# Altium PCB STM32F429_18Bit_20_09.PcbDoc (part 2 of 3)
Units mm, origin at the board's own origin, x right, y up, seen from the top; angles counter-clockwise.
Board outline 101.05 x 79.2 mm, 2 copper layers (Top Layer, Bottom Layer); 115 components, 171 nets, 599 pads, 391 vias.
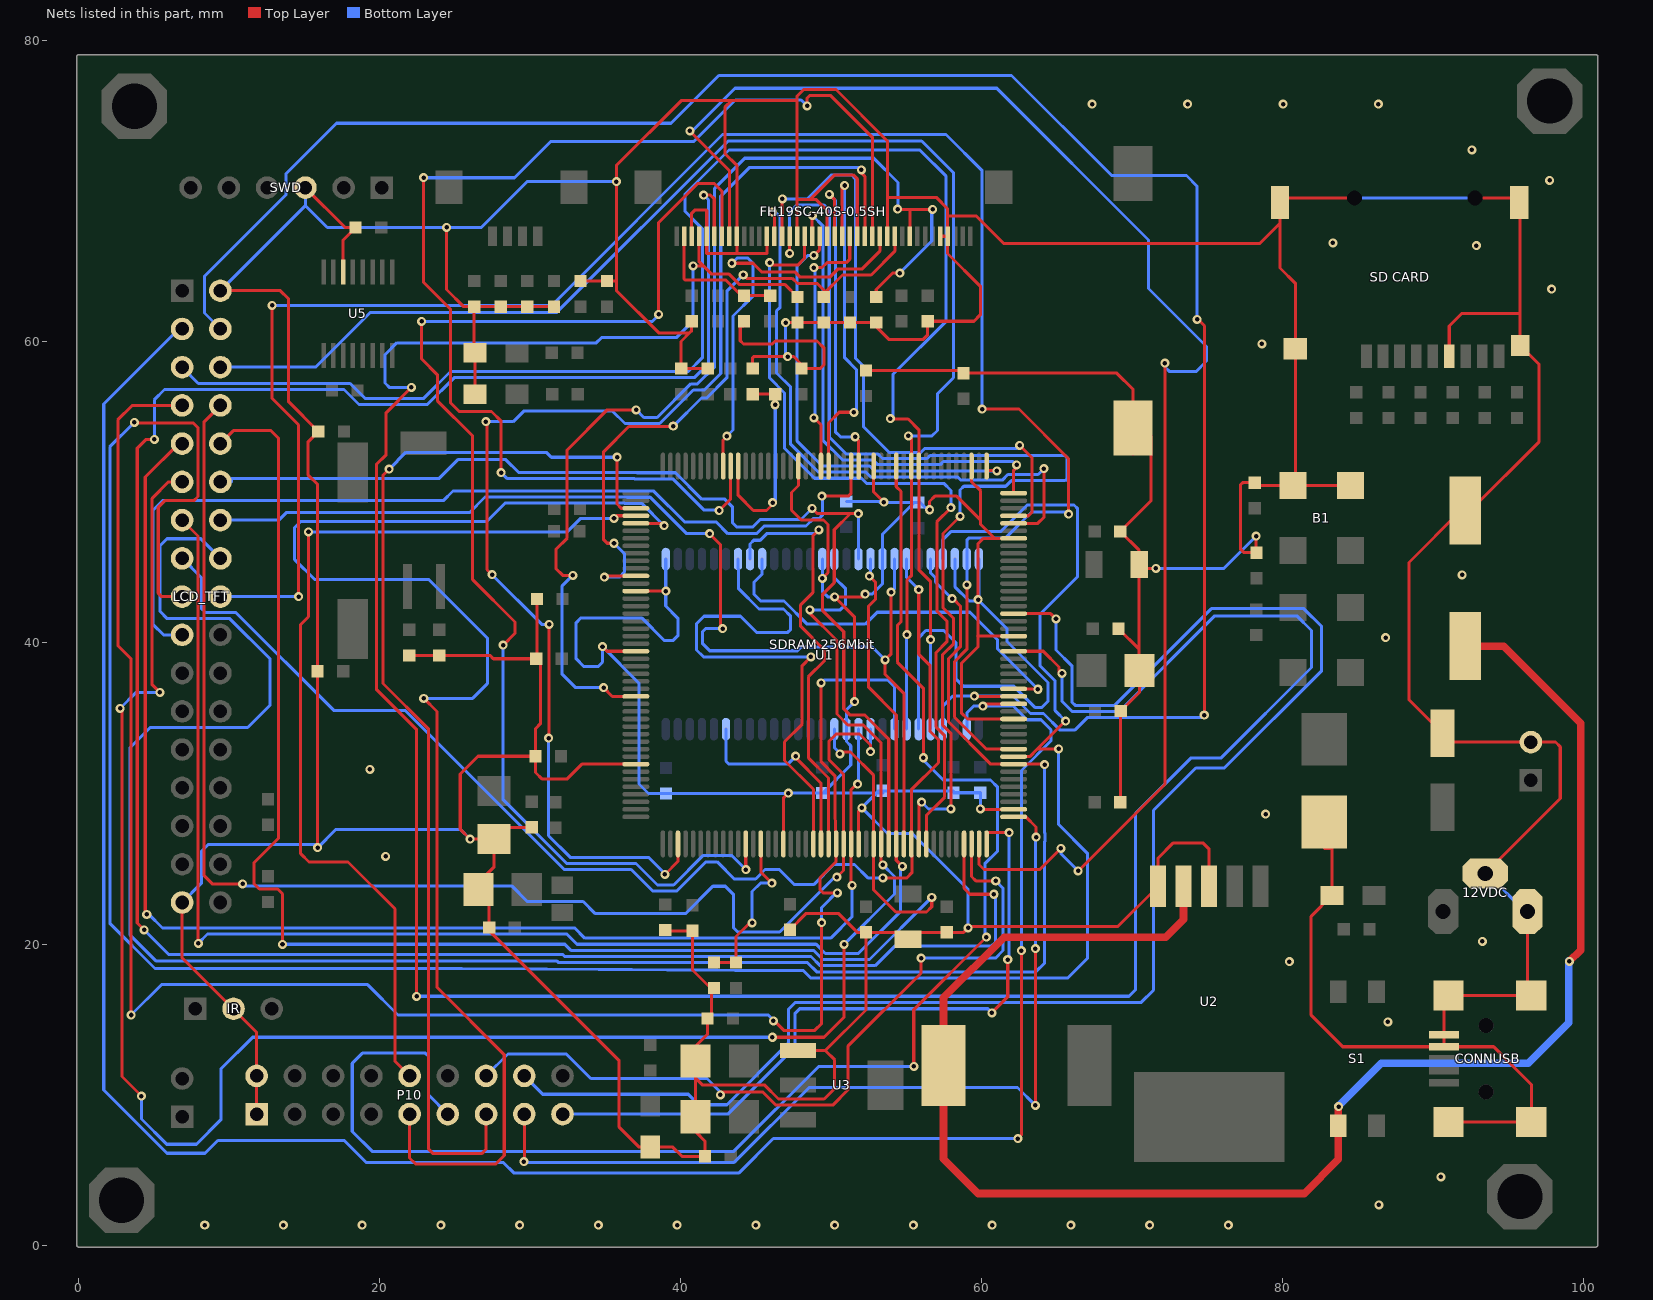
[diagram p2: the nets of this part, all layers, seen from the top]

## Via types
v1: diameter 0.6, hole 0.3, Top Layer to Bottom Layer, 380 vias
v2: diameter 0.8, hole 0.4, Top Layer to Bottom Layer, 9 vias
v3: diameter 1.016, hole 0.508, Top Layer to Bottom Layer, 1 vias
v4: diameter 1.27, hole 0.711, Top Layer to Bottom Layer, 1 vias

## Nets (pads, with @x,y where several pads share a name; then routed paths per layer and width w, separated by ;. In a path a pad name is that pad's centre, name@x,y a point inside that pad or via, vN(x,y) a via of type N, cw(c..) or ccw(c..) an arc to the next point about the centre after c; other vN are vias at no path point) (continued)
A9: "SDRAM 256Mbit.34" U1.65 | length 37.6
  Top Layer w0.203: v1(48.646,39.075) 48.066,38.496 48.066,34.605 46.893,33.432 46.893,32.197 48.816,30.274 U1.65@48.816,26.649
  Bottom Layer w0.203: 43.804,45.575 43.804,44.91 43.843,44.91 43.843,43.601 45.194,42.25 46.825,42.25 47.3,41.775 47.3,40.9 47.108,40.708 45.032,40.708 43.965,41.775 41.541,41.775 41.051,41.285 41.051,39.537 41.513,39.075 v1(48.646,39.075)
A10: "SDRAM 256Mbit.22" U1.66 | length 13.6
  Top Layer w0.203: v1(47.63,32.476) 47.63,32.365 49.316,30.679 U1.66@49.316,26.649
  Bottom Layer w0.203: 43.004,34.275 43.004,32.146 43.205,31.945 47.099,31.945 v1(47.63,32.476)
A11: "SDRAM 256Mbit.35" U1.67 | length 29
  Top Layer w0.203: v1(49.179,47.515) 48.773,47.109 48.773,43.342 47.965,42.534 47.965,41.102 49.53,39.537 49.53,38.805 48.473,37.748 48.473,32.378 49.816,31.035 U1.67@49.816,26.649
  Bottom Layer w0.203: 44.604,45.575 44.604,46.579 44.85,46.825 45.275,46.825 45.709,47.259 48.923,47.259 v1(49.179,47.515)
A12: "SDRAM 256Mbit.36" U1.106 | length 26.7
  Top Layer w0.203: U1.106@62.116,36.949 63.701,36.949 v1(63.725,36.925)
  Bottom Layer w0.203: 45.404,45.575 45.404,44.579 44.875,44.05 44.875,43.225 45.312,42.788 46.862,42.788 48.4,41.25 52.25,41.25 53.042,42.042 59.208,42.042 61.05,40.2 61.05,39.6 v1(63.725,36.925)
B0: FH19SC-40S-0.5SH.19 U1.150 | length 22.4
  Top Layer w0.203: v1(49.875,69.8) 50.225,69.45 FH19SC-40S-0.5SH.19@50.225,67.025 ; v1(51.575,53.7) 51.575,53.693 51.816,53.453 U1.150@51.816,51.749
  Bottom Layer w0.203: v1(49.875,69.8) 50.271,69.404 50.271,54.029 50.607,53.693 51.575,53.693 v1(51.575,53.7)
B1: FH19SC-40S-0.5SH.18 U1.154 | length 24.4
  Top Layer w0.203: U1.154@49.816,51.749 49.816,54.616 50.525,55.325 51.343,55.325 51.5,55.168 v1(51.5,55.325) ; FH19SC-40S-0.5SH.18@50.725,67.025 50.725,70.39 v1(50.886,70.39)
  Bottom Layer w0.203: v1(50.886,70.39) 50.886,58.939 51.675,58.15 51.675,55.343 51.5,55.168 v1(51.5,55.325)
B2: FH19SC-40S-0.5SH.17 U1.155 | length 17.6
  Top Layer w0.203: v1(48.849,54.955) 49.316,54.488 U1.155@49.316,51.749 ; v1(48.849,64.937) 49.387,64.937 49.713,65.263 50.988,65.263 51.225,65.5 FH19SC-40S-0.5SH.17@51.225,67.025
  Bottom Layer w0.203: v1(48.849,54.955) 48.92,55.026 48.92,64.866 v1(48.849,64.937)
B3: FH19SC-40S-0.5SH.15 U1.47 | length 85.3
  Top Layer w0.203: v1(27.056,54.701) 27.132,54.701 27.132,44.871 v1(27.462,44.541) ; v1@31.075,33.675 v1(31.225,33.675) ; v1@31.248,33.675 v1(31.248,41.24) ; v1(38.95,24.625) 39.816,25.491 U1.47@39.816,26.649 ; v1(52,71.425) 51.8,71.425 52.225,71 FH19SC-40S-0.5SH.15@52.225,67.025
  Bottom Layer w0.203: v1(27.056,54.701) 28.864,54.701 29.563,55.4 35.466,55.4 36.292,54.574 38.599,54.574 40.834,56.809 41.559,56.809 42.656,57.906 42.656,69.681 44.55,71.575 51.85,71.575 v1(52,71.425) ; v1(27.462,44.541) 30.763,41.24 v1(31.248,41.24) ; v1@31.025,33.725 31.075,33.675 v1(31.225,33.675) ; v1@31.213,33.475 31.213,27.2 32.653,25.759 37.851,25.759 38.95,24.66 v1(38.95,24.625)
B4: FH19SC-40S-0.5SH.14 U1.167 | length 82.2
  Top Layer w0.203: v1(22.915,70.906) 22.915,63.96 24.7,62.175 24.7,55.95 25.275,55.375 27.425,55.375 28.072,54.728 v1(28.072,51.323) ; v1(42.55,48.8) 43.316,49.566 U1.167@43.316,51.749 ; v1(48.4,75.675) 48.4,76.2 48.556,76.356 49.969,76.356 52.725,73.6 FH19SC-40S-0.5SH.14@52.725,67.025
  Bottom Layer w0.203: v1(22.915,70.906) 28.956,70.906 31.375,73.325 40.875,73.325 43.625,76.075 48,76.075 v1(48.4,75.675) ; v1(28.072,51.323) 28.48,50.914 36.919,50.914 36.933,50.899 39.477,50.899 41.551,48.825 v1@42.55,48.825
B5: FH19SC-40S-0.5SH.13 U1.168 | length 27.9
  Top Layer w0.203: U1.168@42.816,51.749 42.816,53.489 v1(43.062,53.736) ; v1(43.4,65.225) 44.8,65.225 45.367,64.658 47.579,64.658 47.934,64.302 49.902,64.302 50.456,64.856 52.056,64.856 53.225,66.025 FH19SC-40S-0.5SH.13@53.225,67.025
  Bottom Layer w0.203: v1(43.062,53.736) 43.469,54.142 43.469,61.719 44.785,63.035 44.785,65.24 44.45,65.575 43.75,65.575 v1(43.4,65.225)
BOOT0: R90.1 R94.2 U1.166 | length 13.9
  Top Layer w0.203: U1.166@43.816,51.749 43.816,49.809 44.825,48.8 45.7,48.8 v1@46.126,49.226 ; R90.1@44.775,56.525 45.521,56.525 R94.2@46.275,56.525 v1@46.275,55.642 ; v1@46.225,55.775 v1(46.275,55.825)
  Bottom Layer w0.203: v1(46.1,49.325) 46.275,49.5 v1(46.275,55.825)
BOOT1: R91.1 R95.2 U1.58 | length 11.2
  Top Layer w0.203: R91.1@42.2,18.775 42.931,18.775 R95.2@43.675,18.775 43.675,20.495 44.582,21.402 v1(44.734,21.402) ; U1.58@45.316,26.649 45.316,24.782 v1(46.055,24.043)
  Bottom Layer w0.203: v1(44.734,21.402) 44.734,23.484 45.293,24.043 v1(46.055,24.043)
CS: LCD_TFT.19 U1.151 | length 61.6
  Top Layer w0.203: v1(49.375,49.75) 51.125,49.75 51.316,49.941 U1.151@51.316,51.749
  Bottom Layer w0.203: LCD_TFT.19@6.875,40.54 5.635,40.54 4.925,41.25 4.925,48.8 5.575,49.45 24.222,49.45 24.871,50.099 36.585,50.099 36.597,50.087 38.213,50.087 40.25,48.05 42.34,48.05 43.131,47.259 45.034,47.259 45.542,47.767 48.315,47.767 48.799,48.25 49.18,48.25 49.408,48.478 v1@49.408,49.75
D0: "SDRAM 256Mbit.2" LCD_TFT.3 U1.104 | length 155.2
  Top Layer w0.203: v1(60.075,35.8) 60.067,35.8 60.217,35.949 U1.104@62.116,35.949 ; v1(62.387,7.076) 62.631,7.32 v1(62.631,19.568)
  Bottom Layer w0.203: LCD_TFT.3@6.875,60.86 6.66,60.86 1.669,55.869 1.669,10.306 5.874,6.1 8.4,6.1 9.25,6.95 17.644,6.95 19.119,5.475 28.225,5.475 28.9,4.8 43.875,4.8 46.151,7.076 v1(62.387,7.076) ; 59.004,34.275 59.004,35.354 59.45,35.8 62.1,35.8 63,34.9 63.925,34.9 64.6,34.225 64.6,33.495 62.631,31.527 v1(62.631,19.568)
D1: "SDRAM 256Mbit.4" LCD_TFT.4 U1.105 | length 138
  Top Layer w0.203: v1(59.5,36.475) 59.5,36.409 59.54,36.449 U1.105@62.116,36.449 ; v1(74.3,61.5) 74.359,61.5 74.792,61.067 74.792,35.217 v1(74.775,35.2)
  Bottom Layer w0.203: LCD_TFT.4@9.415,60.86 8.36,61.915 8.36,64.36 13.775,69.775 13.775,71.175 17.125,74.525 39.35,74.525 42.525,77.7 61.975,77.7 68.625,71.05 73.6,71.05 74.3,70.35 v1(74.3,61.5) ; 57.404,34.275 57.404,35.804 58.075,36.475 v1(59.5,36.475) 62.075,36.475 63.231,35.319 64.1,35.319 65.211,34.208 66.167,34.208 67,35.041 74.655,35.041 74.814,35.2 v1(74.775,35.2)
D2: "SDRAM 256Mbit.5" LCD_TFT.5 U1.142 | length 107.2
  Top Layer w0.203: v1(53.925,54.9) 53.946,54.879 55.104,54.879 55.816,54.168 U1.142@55.816,51.749 55.816,44.859 56.604,44.071 v1(56.604,40.218)
  Bottom Layer w0.203: LCD_TFT.5@6.875,58.32 7.954,57.241 18.034,57.241 19.025,56.25 22.925,56.25 24.703,58.028 40.518,58.028 41.43,58.941 41.43,67.519 40.275,68.674 40.275,69.825 43.2,72.75 55.875,72.75 57.631,70.994 57.631,61.381 54.105,57.855 54.105,55.08 v1(53.925,54.9) ; 56.604,34.275 v1(56.604,40.218)
D3: "SDRAM 256Mbit.7" LCD_TFT.6 U1.143 | length 95.1
  Top Layer w0.203: v1(55.015,40.553) 55.031,40.57 55.031,44.181 55.316,44.466 U1.143@55.316,51.749 55.316,53.568 v1(55.123,53.761)
  Bottom Layer w0.203: LCD_TFT.6@9.415,58.32 15.739,58.32 19.385,61.965 31.765,61.965 43.15,73.35 56,73.35 58.114,71.236 58.114,57.621 57.05,56.557 57.05,54.119 56.693,53.761 v1(55.123,53.761) ; 55.004,34.275 55.004,40.542 v1(55.015,40.553)
D4: "SDRAM 256Mbit.8" LCD_TFT.7 U1.68 | length 125.9
  Top Layer w0.203: v1(3.484,15.285) 3.484,38.953 2.6,39.837 2.6,54.825 3.555,55.78 LCD_TFT.7@6.875,55.78 ; v1(46.15,14.9) 46.202,14.9 46.831,14.27 48.906,14.27 49.357,14.721 v1(49.357,21.427) ; v1(49.325,37.35) 49.325,32.1 50.239,31.186 50.239,28.793 U1.68@50.316,26.649 50.316,25.466 49.25,24.4 49.25,23.6 49.45,23.4 v1(50.4,23.4)
  Bottom Layer w0.203: v1(3.484,15.285) 5.499,17.3 19.2,17.3 21.215,15.285 45.817,15.285 46.202,14.9 v1(46.15,14.9) ; v1(49.325,37.35) 49.334,37.35 49.537,37.553 53.75,37.553 54.204,37.099 54.204,34.275 ; v1(49.357,21.427) 49.357,22.432 v1@50.493,23.568
D5: "SDRAM 256Mbit.10" LCD_TFT.8 U1.69 | length 94.6
  Top Layer w0.203: LCD_TFT.8@9.415,55.78 8.336,54.701 8.336,24.54 8.877,24 v1(10.9,24) ; v1(50.375,24.45) 50.816,24.891 U1.69@50.816,26.649 50.816,31.284 49.85,32.25 49.85,33.475 50.325,33.95 51.875,33.95 52.604,33.221 v1(52.604,32.781)
  Bottom Layer w0.203: v1(10.9,24) 10.765,23.865 28.762,23.865 29.799,22.829 33.512,22.829 34.325,22.016 40.31,22.016 42.134,23.84 42.956,23.84 43.515,23.281 43.515,21.06 43.778,20.797 46.572,20.797 v1@50.3,24.525 ; v1(52.604,32.781) 52.604,34.275
D6: "SDRAM 256Mbit.11" LCD_TFT.9 U1.70 | length 93.6
  Top Layer w0.203: v1(4.525,21.975) 4.664,21.975 4.425,22.214 4.425,51.025 6.64,53.24 LCD_TFT.9@6.875,53.24 ; v1(51.389,23.891) 51.316,23.964 U1.70@51.316,26.649 51.316,30.266 51.674,30.625 v1(51.75,30.625)
  Bottom Layer w0.203: v1(4.525,21.975) 4.664,21.975 5.57,21.069 11.168,21.069 11.175,21.075 32.945,21.075 33.629,20.39 49.955,20.39 51.389,21.824 v1(51.389,23.891) ; v1(51.75,30.625) 51.674,30.625 51.804,30.754 51.804,34.275
D7: "SDRAM 256Mbit.13" LCD_TFT.10 U1.73 | length 103.1
  Top Layer w0.203: LCD_TFT.10@9.415,53.24 10.275,54.1 12.775,54.1 13.289,53.586 13.289,27.039 11.65,25.4 11.65,24.006 12.006,23.65 13.225,23.65 13.543,23.332 v1(13.543,19.984) ; v1(50.575,32.625) 50.575,32.678 50.678,32.781 50.704,32.754 51.271,32.754 52.816,31.209 U1.73@52.816,26.649 52.816,23.595 54.286,22.125 56.325,22.125 56.672,22.472 v1(56.672,23.103)
  Bottom Layer w0.203: v1(13.543,19.984) 32.293,19.984 32.699,19.578 48.823,19.578 49.432,18.968 52.537,18.968 v1(56.672,23.103) ; 50.204,34.275 50.204,33.049 50.575,32.678 v1(50.575,32.625)
D8: "SDRAM 256Mbit.42" LCD_TFT.11 U1.74 | length 136.7
  Top Layer w0.203: v1(2.75,35.65) 2.925,35.65 2.875,35.6 2.875,11.2 v1(4.175,9.9) ; v1(5.389,36.718) 4.881,37.226 4.881,49.608 5.974,50.7 LCD_TFT.11@6.875,50.7 ; v1(46.08,13.807) 49.509,13.807 50.855,15.153 v1(50.855,19.979) ; v1(48.569,42.204) 48.569,41.976 50.375,40.17 50.375,35.275 51.1,34.55 52.125,34.55 53.316,33.359 U1.74@53.316,26.649 53.316,25.368 v1(53.421,25.262)
  Bottom Layer w0.203: v1(2.75,35.65) 3.818,36.718 v1(5.389,36.718) ; v1(4.175,9.9) 4.175,8.375 5.85,6.7 7.825,6.7 9.45,8.325 9.45,11.7 11.557,13.807 v1(46.08,13.807) ; v1(48.569,42.204) 50.604,42.204 50.95,42.55 50.95,43.6 50.204,44.346 50.204,45.575 ; v1(50.855,19.979) 54.2,23.324 54.2,24.483 v1(53.421,25.262)
D9: "SDRAM 256Mbit.44" LCD_TFT.12 U1.75 | length 74.9
  Top Layer w0.203: v1(48.722,48.935) 49.061,48.596 v1(51.804,48.596) 51.271,48.596 50.195,47.52 50.195,44.008 49.425,43.238 49.425,42.15 50.825,40.75 50.825,35.625 51.225,35.225 52.2,35.225 53.816,33.609 U1.75@53.816,26.649
  Bottom Layer w0.203: LCD_TFT.12@9.415,50.7 10.139,50.7 10.139,50.916 23.931,50.916 25.19,52.175 28.375,52.175 29.23,51.32 37.087,51.32 37.102,51.306 39.645,51.306 41.401,49.55 42.925,49.55 43.425,49.05 43.425,48 43.734,47.691 44.766,47.691 45.274,48.199 47.985,48.199 v1(48.722,48.935) ; 51.804,45.575 v1(51.804,48.596)
D10: "SDRAM 256Mbit.45" LCD_TFT.13 U1.76 | length 101.9
  Top Layer w0.203: LCD_TFT.13@6.875,48.16 7.93,47.105 7.93,20.07 v1(7.95,20.05) ; v1(52.532,44.439) 52.95,44.021 52.95,42.925 52.481,42.456 52.481,37.048 54.316,35.213 U1.76@54.316,26.649 54.316,25.561 v1(54.716,25.161)
  Bottom Layer w0.203: v1(7.95,20.05) 8.562,20.662 11.337,20.662 11.339,20.665 32.425,20.665 33.106,19.984 48.991,19.984 49.601,19.374 51.799,19.374 54.606,22.181 54.606,24.652 54.597,24.661 54.597,25.041 v1(54.716,25.161) ; v1(52.532,44.439) 52.604,44.511 52.604,45.575
D11: "SDRAM 256Mbit.47" LCD_TFT.14 U1.77 | length 75.5
  Top Layer w0.203: v1(41.915,47.259) 42.631,46.543 42.631,41.107 v1(42.778,40.96) ; v1(53.98,43.377) 53.98,39.283 v1(53.573,38.877) 53.573,37.912 54.816,36.669 U1.77@54.816,26.649
  Bottom Layer w0.203: LCD_TFT.14@9.415,48.16 13.289,48.16 13.785,48.656 25.963,48.656 27,49.692 36.416,49.692 36.428,49.68 37.97,49.68 40.391,47.259 v1(41.915,47.259) ; v1(42.778,40.96) 41.661,40.96 41.457,40.756 41.457,39.944 41.919,39.482 47.757,39.482 48.015,39.74 52.71,39.74 v1(53.573,38.877) ; v1(53.98,43.377) 54.204,43.602 54.204,45.575
D12: "SDRAM 256Mbit.48" LCD_TFT.15 U1.78 | length 84.4
  Top Layer w0.203: v1(53.421,24.399) 55.024,24.399 55.351,24.726 55.351,25.872 55.316,25.872 U1.78@55.316,26.649 55.316,30.241 57.124,32.049 57.124,33.576 56.545,34.155 56.545,38.521 55.808,39.258 v1(55.808,43.55)
  Bottom Layer w0.203: LCD_TFT.15@6.875,45.62 8.15,44.345 8.15,42.3 8.425,42.025 10.445,42.025 16.946,35.524 21.676,35.524 32.253,24.947 36.703,24.947 38.131,23.519 39.739,23.519 41.681,25.461 42.414,25.461 43.55,24.325 44.975,24.325 45.6,24.95 46.55,24.95 47.556,23.944 48.825,23.944 50.17,25.288 51.537,25.288 52.426,24.399 v1(53.421,24.399) ; 55.004,45.575 55.004,44.355 v1(55.808,43.55)
D13: "SDRAM 256Mbit.50" LCD_TFT.16 U1.96 | length 138.5
  Top Layer w0.203: v1(58.021,42.941) 58.095,42.941 58.575,42.461 58.575,39.75 57.779,38.954 57.779,34.763 60.593,31.949 U1.96@62.116,31.949 v1@64.175,31.949
  Bottom Layer w0.203: LCD_TFT.16@9.415,45.62 8.11,46.925 5.875,46.925 5.4,46.45 5.4,42.1 5.881,41.619 10.039,41.619 12.725,38.933 12.725,35.875 11.231,34.381 4.754,34.381 3.4,33.027 3.4,20.625 5.163,18.862 31.79,18.862 31.886,18.765 48.422,18.765 49.031,18.155 63.586,18.155 64.175,18.745 64.175,26.82 64.205,26.849 64.205,27.351 64.175,27.38 v1(64.175,31.925) ; 56.604,45.575 56.604,44.646 56.926,44.324 56.926,44.036 v1(58.021,42.941)
D14: "SDRAM 256Mbit.51" LCD_TFT.17 U1.97 | length 167.8
  Top Layer w0.203: v1@3.7,54.625 7.6,54.625 7.93,54.295 7.93,49.73 7.65,49.45 5.725,49.45 5.288,49.013 5.288,43.312 5.52,43.08 LCD_TFT.17@6.875,43.08 ; U1.97@62.116,32.449 63.173,32.449 63.682,32.959 ; v1(65.105,32.959) 63.682,32.959 ; v1(65.562,34.813) 65.537,34.813 63.682,32.959
  Bottom Layer w0.203: v1(3.7,54.65) 2.075,53.025 2.075,21.375 5.071,18.379 25.455,18.379 48.147,18.227 48.625,17.749 65.714,17.749 67.01,19.044 67.01,26.04 65.105,27.945 v1(65.105,32.959) ; 57.404,45.575 57.404,46.854 57.941,47.391 61.241,47.391 63.009,49.159 66.121,49.159 66.365,48.915 66.365,44.415 63.875,41.925 63.875,38.475 64.875,37.475 64.875,35.5 v1(65.562,34.813)
D15: "SDRAM 256Mbit.53" LCD_TFT.18 U1.98 | length 129.3
  Top Layer w0.203: v1(12.857,62.423) 12.857,56.243 14.61,54.49 v1(14.61,43.08) ; v1(59.004,43.86) 59.004,39.578 58.186,38.761 58.186,35.074 60.311,32.949 U1.98@62.116,32.949 ; v1(60.02,55.539) 62.463,55.539 65.76,52.242 v1(65.76,48.554)
  Bottom Layer w0.203: LCD_TFT.18@9.415,43.08 v1(14.61,43.08) ; v1(12.857,62.423) 31.423,62.423 42.775,73.775 57.625,73.775 60.02,71.38 v1(60.02,55.539) ; v1(59.004,43.86) 59.004,45.575 59.004,46.829 59.159,46.984 61.584,46.984 63.302,48.702 65.613,48.702 v1(65.76,48.554)
DCLK: C95.1 FH19SC-40S-0.5SH.37 U1.111 | length 184.8
  Top Layer w0.203: v1(22.1,56.975) 20.425,55.3 20.425,52.5 19.775,51.85 19.775,36.925 22.458,34.242 v1(22.458,16.53) ; v1(40.825,65.05) 41.5,65.05 ; FH19SC-40S-0.5SH.37@41.225,67.025 41.225,65.325 41.5,65.05 ; C95.1@47.761,62.982 46.936,63.806 43.903,63.806 43.756,63.953 43.184,64.525 42.025,64.525 41.5,65.05 ; U1.111@62.116,39.449 64.089,39.449 65.13,38.408 65.13,38.064 65.219,37.975 v1(65.325,37.975)
  Bottom Layer w0.203: v1(22.1,56.975) 22.087,56.962 20.663,56.962 20.35,57.275 20.35,59.15 21.139,59.939 34.389,59.939 34.731,60.281 39.705,60.281 40.822,61.399 v1@40.822,65.05 ; v1(22.458,16.53) 69.778,16.53 70.21,16.961 70.21,28.685 73.874,32.349 75.874,32.349 81.9,38.375 81.9,40.825 80.927,41.798 75.468,41.798 69.119,35.448 66.002,35.448 65.325,36.126 v1(65.325,37.975)
DCMI_D0: P10.14 U1.86 | length 52
  Top Layer w0.203: v1(42.625,9.975) 42.625,10.176 45.449,10.176 46.325,9.3 50.1,9.3 51.1,10.3 51.1,13.2 55.961,18.061 v1(55.961,19.065) ; U1.86@59.316,26.649 59.316,24.484 59.6,24.2 v1(60.925,24.2)
  Bottom Layer w0.203: P10.14@27.065,11.24 28.525,12.7 32.391,12.7 34.027,11.064 41.737,11.064 42.625,10.176 v1(42.625,9.975) ; v1(55.961,19.065) 60.909,19.065 61.412,19.568 61.412,23.713 v1(60.925,24.2)
DCMI_D1: P10.16 U1.116 | length 105.7
  Top Layer w0.203: U1.116@62.116,41.949 64.572,41.949 v1(64.927,41.595)
  Bottom Layer w0.203: P10.16@29.605,11.24 30.823,10.022 40.503,10.022 41.2,9.325 43.075,9.325 47.15,13.4 47.15,15.65 47.623,16.123 70.591,16.123 71.404,16.936 71.404,28.879 74.214,31.689 76.114,31.689 82.575,38.15 82.575,41.092 81.392,42.275 75.25,42.275 68.83,35.855 66.205,35.855 65.977,36.083 65.977,38.487 64.927,39.537 v1(64.927,41.595)
DCMI_D2: P10.17 U1.88 | length 47.5
  Top Layer w0.203: U1.88@60.316,26.649 60.316,27.396 v1(61.819,27.396) ; v1(60.66,15.433) 61.722,16.495 v1(61.722,18.963)
  Bottom Layer w0.203: P10.17@32.145,8.7 43.125,8.7 47.575,13.15 47.575,15.375 47.9,15.7 60.392,15.7 v1(60.66,15.433) ; v1(61.722,18.963) 61.819,19.06 v1(61.819,27.396)
DCMI_D3: P10.15 U1.89 | length 59.8
  Top Layer w0.203: v1@29.605,5.55 P10.15@29.605,8.7 ; U1.89@62.116,28.449 62.926,28.449 63.6,27.775 v1(63.6,27.1) ; v1(63.555,9.286) v1(63.555,19.7)
  Bottom Layer w0.203: v1@29.747,5.5 43.55,5.5 48.525,10.475 62.366,10.475 v1(63.555,9.286) ; v1(63.555,19.7) v1@63.555,27.1
  other v1: 29.575,5.55
DCMI_D4: P10.13 U1.3 | length 73.2
  Top Layer w0.203: v1(20.625,51.55) 20.223,51.148 20.223,37.302 23.25,34.275 23.25,6.375 23.55,6.075 26.775,6.075 27.065,6.365 P10.13@27.065,8.7 ; v1(35.768,52.339) 35.768,49.229 36.047,48.949 U1.3@37.016,48.949
  Bottom Layer w0.203: v1(20.625,51.55) 21.739,52.664 31.074,52.664 31.399,52.339 v1(35.768,52.339)
DCMI_D5: P10.11 U1.145 | length 101.6
  Top Layer w0.203: U1.145@54.316,51.749 54.316,50.384 54.625,50.075 54.625,41.402 54.386,41.163 54.386,38.724 56.113,36.997 v1(56.113,32.374) ; v1(55.478,11.877) 55.478,15.636 v1(60.304,20.462)
  Bottom Layer w0.203: P10.11@24.525,8.7 23.25,9.975 23.25,12.525 23.025,12.75 18.85,12.75 18.175,12.075 18.175,7.55 19.5,6.225 43.525,6.225 49.177,11.877 v1(55.478,11.877) ; v1(56.113,32.374) 56.113,32.222 57.434,30.901 60.574,30.901 61.05,30.425 61.05,26.186 60.203,25.339 60.203,20.563 v1(60.304,20.462)
DCMI_D6: P10.10 U1.4 | length 63.1
  Top Layer w0.203: v1(15.27,47.386) 15.27,41.745 14.75,41.225 14.75,26 15.3,25.45 17.9,25.45 21.01,22.34 21.01,12.215 P10.10@21.985,11.24 ; v1(35.565,48.275) 35.739,48.449 U1.4@37.016,48.449
  Bottom Layer w0.203: v1(15.27,47.386) 32.466,47.386 33.355,48.275 v1(35.565,48.275)
DCMI_D7: P10.9 U1.5 | length 94.7
  Top Layer w0.203: P10.9@21.985,8.7 21.985,5.79 22.375,5.4 27.725,5.4 28.275,5.95 28.275,12.65 23.8,17.125 23.8,35.45 v1(22.925,36.325) ; U1.5@37.016,47.949 38.751,47.949 v1(38.9,47.8)
  Bottom Layer w0.203: v1(22.925,36.325) 26.175,36.325 27.15,37.3 27.15,40.325 23.264,44.211 15.676,44.211 14.35,45.537 14.35,47.675 14.747,48.072 27.111,48.072 28.326,49.286 36.248,49.286 36.26,49.274 37.401,49.274 38.874,47.8 v1(38.9,47.8)
DE: C92.1 FH19SC-40S-0.5SH.9 U1.28 | length 73.5
  Top Layer w0.203: v1(32.831,44.49) 32.16,44.49 31.7,44.95 31.7,46.214 32.45,46.964 32.45,52.825 35.113,55.488 v1(37.038,55.488) ; v1(34.879,37.027) 35.457,36.449 U1.28@37.016,36.449 ; C92.1@52.986,62.982 52.986,63.486 54.075,64.575 v1(54.55,64.575) ; v1(54.4,68.825) 54.425,68.85 54.425,68.8 v1(56.725,68.8) ; FH19SC-40S-0.5SH.9@55.225,67.025 55.225,68.8
  Bottom Layer w0.203: v1(32.831,44.49) 32.1,43.759 32.1,37.945 33.017,37.027 v1(34.879,37.027) ; v1(37.038,55.488) 37.546,54.98 38.431,54.98 40.666,57.216 41.116,57.216 42.25,58.35 42.25,70.2 44.25,72.2 52.825,72.2 54.437,70.588 v1@54.437,68.825 ; v1(54.55,64.575) 56.672,66.697 v1@56.672,68.8
E5V: Cout.1 L1.2 S1.1 U2.4 | length 110.4
  Top Layer w0.508: U2.4@73.4,23.825 73.4,21.64 72.217,20.457 61.488,20.457 57.45,16.419 L1.2@57.45,11.925 57.45,5.747 59.772,3.425 81.41,3.425 83.68,5.695 S1.1@83.68,7.925 83.68,9.17 83.65,9.2 v1(83.7,9.2) ; Cout.1@92.125,39.8 92.125,39.791 94.659,39.791 99.775,34.675 99.775,19.6 v1(99.025,18.85)
  Bottom Layer w0.508: v1(83.7,9.2) 83.65,9.2 86.525,12.075 96.3,12.075 99,14.775 99,18.875 v1(99.025,18.85)
G0: FH19SC-40S-0.5SH.27 U1.128 | length 41.6
  Top Layer w0.203: v1(46.106,68.62) 46.225,68.501 FH19SC-40S-0.5SH.27@46.225,67.025 ; U1.128@62.116,47.949 63.724,47.949 64.125,48.35 64.125,51.414 63.964,51.575 v1(64.125,51.575)
  Bottom Layer w0.203: v1(46.106,68.62) 46.279,68.62 46.6,68.299 46.6,62.303 46.364,62.067 46.364,57.936 47.299,57.001 47.299,53.201 49.152,51.348 52.302,51.348 52.632,51.018 58.411,51.018 58.612,50.817 61.357,50.817 61.731,51.191 63.741,51.191 v1(64.125,51.575)
G1: FH19SC-40S-0.5SH.26 U1.129 | length 42.2
  Top Layer w0.203: FH19SC-40S-0.5SH.26@46.725,67.025 v1@46.725,69.5 ; U1.129@62.116,48.449 63.095,48.449 63.327,48.681 63.327,52.311 v1(62.514,53.124)
  Bottom Layer w0.203: v1(46.75,69.5) 48.425,69.5 50.025,71.1 51.343,71.1 51.597,70.846 51.597,58.933 52.14,58.39 52.14,54.36 53.842,52.658 55.943,52.658 56.208,52.923 62.313,52.923 v1(62.514,53.124)
G2: FH19SC-40S-0.5SH.25 U1.79 | length 74.8
  Top Layer w0.203: v1(47.225,65.877) FH19SC-40S-0.5SH.25@47.225,67.025 ; U1.79@55.816,26.649 55.816,29.241 v1(56,29.425) ; v1(57.937,28.971) 57.937,34.013 57.373,34.577 57.373,39.198 58.125,39.95 58.125,41.628 57.417,42.336 57.417,47.267 v1(58.552,48.402)
  Bottom Layer w0.203: v1(47.225,65.877) 47.225,68.625 47.694,69.094 48.593,69.094 48.6,69.1 49.525,69.1 49.865,68.76 49.865,53.685 50.982,52.568 53.082,52.568 53.398,52.252 56.367,52.252 56.581,52.466 65.509,52.466 65.675,52.3 65.675,50.925 65.535,50.785 61.96,50.785 61.585,50.41 58.806,50.41 58.552,50.156 v1(58.552,48.402) ; v1(56,29.425) 56.454,28.971 v1(57.937,28.971)
G3: FH19SC-40S-0.5SH.23 U1.80 | length 54.2
  Top Layer w0.203: v1(45.902,65.267) 46.07,65.1 47.775,65.1 48.225,65.55 FH19SC-40S-0.5SH.23@48.225,67.025 ; U1.80@56.316,26.649 56.316,28.541 57.531,29.756 57.531,33.844 56.967,34.408 56.967,39.366 57.675,40.075 57.675,41.463 57.01,42.128 57.01,48.049 v1(57.947,48.986)
  Bottom Layer w0.203: v1(45.902,65.267) 45.902,57.597 46.893,56.606 46.893,52.932 48.883,50.942 52.008,50.942 52.344,50.606 57.469,50.606 57.947,50.128 v1(57.947,48.986)
G4: FH19SC-40S-0.5SH.22 U1.132 | length 32.5
  Top Layer w0.203: FH19SC-40S-0.5SH.22@48.725,67.025 48.725,68.16 48.722,68.163 48.75,68.191 v1(48.75,68.4) ; U1.132@62.116,49.949 62.116,51.483 62.463,51.831 v1(62.311,51.831)
  Bottom Layer w0.203: v1(48.75,68.4) 49.458,67.692 49.458,53.442 50.739,52.161 52.764,52.161 53.08,51.845 57.231,51.845 57.445,52.059 62.082,52.059 v1(62.311,51.831)
G5: FH19SC-40S-0.5SH.21 U1.133 | length 29.6
  Top Layer w0.203: v1(48.849,65.75) 49.225,66.126 FH19SC-40S-0.5SH.21@49.225,67.025 ; U1.133@60.316,51.749 60.316,51.45 60.975,51.45 v1(61,51.425)
  Bottom Layer w0.203: v1(48.849,65.75) 48.45,65.75 47.708,65.008 47.708,53.442 49.395,51.755 52.545,51.755 52.876,51.424 60.838,51.424 60.863,51.45 60.888,51.425 v1(61,51.425)
GND: 12VDC.2 12VDC.3 "SD CARD.6" "SDRAM 256Mbit.6" "SDRAM 256Mbit.12" "SDRAM 256Mbit.28" "SDRAM 256Mbit.41" "SDRAM 256Mbit.46" "SDRAM 256Mbit.52" "SDRAM 256Mbit.54" B1.1 B1.4 BT1.2 C1.2 C2.2 C3.2 C4.2 C5.2 C7.2 C20.2 C21.2 C22.2 C23.2 C26.2 C27.2 C28.2 C29.2 C33.2 C34.2 C35.2 C36.2 C37.2 C48.2 C49.2 C50.2 C53.2 C54.2 C56.2 C57.2 C58.2 C60.2 C61.2 C65.2 C66.2 C67.2 C68.2 C69.2 C74.2 C75.2 C91.1 C92.2 C93.2 C94.2 C95.2 C143.2 C144.2 C145.2 C146.2 C149.2 C151.2 C152.2 Cin.2 CONNUSB.4 CONNUSB.5 CONNUSB.SHIELD Cout.2 D1.1 FH19SC-40S-0.5SH.4 FH19SC-40S-0.5SH.5 FH19SC-40S-0.5SH.12 FH19SC-40S-0.5SH.16 FH19SC-40S-0.5SH.20 FH19SC-40S-0.5SH.24 FH19SC-40S-0.5SH.28 FH19SC-40S-0.5SH.32 FH19SC-40S-0.5SH.36 FH19SC-40S-0.5SH.38 IR.2 JP1.2 LCD_TFT.2 LCD_TFT.33 LD3.2 LD4.2 LD9.2 LD10.2 P10.1 P10.2 R4.1 R8.2 R9.2 R41.1 R71.2 R72.2 R90.2 R91.2 R153.2 SWD.3 U1.14 U1.22 U1.37 U1.61 U1.71 U1.90 U1.102 U1.113 U1.126 U1.135 U1.148 U1.158 U2.3 U2.5 U3.1 U5.6 | length 876.1
  Top Layer w0.203: LCD_TFT.33@6.875,22.76 6.875,19.075 11.825,14.125 P10.2@11.825,11.24 P10.1@11.825,8.7 ; LCD_TFT.2@9.415,63.4 13.4,63.4 13.949,62.851 13.949,56.026 C23.2@15.925,54.05 15.25,53.375 15.25,51.15 15.875,50.525 C20.2@15.875,38.125 v1(15.875,26.405) ; SWD.3@15.061,70.249 17.71,67.6 R41.1@18.4,67.6 17.575,66.775 U5.6@17.575,64.65 ; C21.2@21.959,39.176 C22.2@23.959,39.176 27.325,39.176 27.551,38.95 C56.2@30.4,38.95 ; v1(24.439,67.604) 24.439,63.486 25.584,62.341 C3.2@26.275,62.341 ; LD3.2@26.318,56.526 LD4.2@26.318,59.276 26.275,59.319 C3.2@26.275,62.341 ; C75.2@26.8,26.975 27.575,27.75 C69.2@30.1,27.75 ; 27.157,62.341 C4.2@28.04,62.341 28.91,62.341 ; 27.157,62.341 C3.2@26.275,62.341 ; C75.2@27.6,26.975 27.6,25.125 26.566,24.091 C74.2@26.566,23.624 27.275,23.624 C68.2@27.275,21.1 27.275,20.875 35.905,12.245 35.905,7.838 37.235,6.509 LD10.2@37.975,6.509 39.476,6.509 40.085,5.899 C27.2@41.616,5.899 41.616,6.898 40.991,7.523 C26.2@40.991,8.524 40.991,11.089 ; C75.2@27.85,26.975 v1(26.003,26.975) 25.35,27.628 25.35,31.3 26.525,32.475 C65.2@30.35,32.475 ; 28.91,62.341 C1.2@29.805,62.341 C2.2@31.57,62.341 ; C54.2@30.45,42.925 30.45,39 C56.2@30.4,38.95 ; C5.2@33.335,64.041 34.193,64.041 C7.2@35.1,64.041 35.717,64.041 ; v1(34.8,39.75) 35.101,39.449 U1.22@37.016,39.449 ; U1.37@37.016,31.949 33.424,31.949 32.425,30.95 30.8,30.95 30.35,31.4 C65.2@30.35,32.475 ; U1.14@37.016,43.449 v1(39.004,43.449) ; R71.2@38.975,20.925 39.025,20.875 C67.2@40.775,20.875 40.775,18.275 41.975,17.075 R91.2@42.2,17.075 42.05,16.925 42.05,15.325 C29.2@41.775,15.05 41.775,14.007 40.991,13.223 C28.2@40.991,12.224 40.991,11.089 ; R9.2@40.725,61.373 40.725,60.74 40.584,60.598 ; FH19SC-40S-0.5SH.38@40.725,67.025 40.725,68.55 40.925,68.75 41.7,68.75 41.725,68.725 FH19SC-40S-0.5SH.36@41.725,67.025 41.725,65.875 43.725,65.875 ; R72.2@41.8,58.225 41.244,58.225 C49.2@40.025,58.225 40.025,58.517 40.016,58.517 40.016,60.03 40.584,60.598 ; 43.375,76.025 42.931,75.581 42.931,72.519 43.725,71.725 FH19SC-40S-0.5SH.32@43.725,67.025 43.725,65.869 45.725,65.869 FH19SC-40S-0.5SH.28@45.725,67.025 ; R8.2@44.209,61.373 44.209,61.072 43.95,61.072 43.95,60.075 44.169,59.856 46.081,59.856 46.281,60.056 49.052,60.056 49.525,59.583 49.525,58.5 49.25,58.225 C48.2@48.025,58.225 48.025,58.5 47.5,59.025 44.85,59.025 44.775,58.95 R90.2@44.775,58.225 ; U1.61@46.816,26.649 46.816,29.694 v1(47.147,30.025) ; v1(46.969,61.282) C95.2@47.761,61.282 C94.2@49.509,61.282 ; C66.2@47.25,20.95 48.337,22.037 50.463,22.037 51.725,20.775 C60.2@52.3,20.775 ; FH19SC-40S-0.5SH.24@47.725,67.025 47.725,69.475 ; 47.725,76.025 40.025,76.025 35.717,71.717 v1(35.717,70.652) 35.717,64.041 ; U3.1@47.8,12.925 49.604,12.925 ; U1.158@47.816,51.749 47.816,50.466 47.35,50 47.35,48.825 48.002,48.173 49.479,48.173 49.784,47.868 49.784,44.667 v1(49.404,44.287) ; 48.575,69.45 50.225,71.1 51.455,71.1 51.725,70.83 FH19SC-40S-0.5SH.16@51.725,67.025 ; C94.2@49.502,61.282 C94.2@49.509,61.282 ; FH19SC-40S-0.5SH.20@49.725,67.025 49.725,68.725 49,69.45 47.75,69.45 47.725,69.475 ; v1@51.534,36.1 51.534,41.75 v1(50.217,43.068) 52.068,43.068 v1(52.25,43.25) ; U1.71@51.816,26.649 51.816,28.841 v1(52.025,29.05) ; C34.2@52.3,58.1 52.305,58.105 58.595,58.105 C61.2@58.775,57.925 68.966,57.925 70.05,56.841 BT1.2@70.05,54.275 70.05,52.57 71.225,53.745 71.225,49.425 C57.2@69.2,47.4 70.45,46.15 C33.2@70.45,45.225 C33.2@70.45,44.947 ; U1.148@52.816,51.749 52.816,50.034 v1(53.5,49.35) ; FH19SC-40S-0.5SH.12@53.725,67.025 53.725,73.35 50.313,76.762 48.162,76.762 47.725,76.325 47.725,69.475 ; 53.725,69.6 56.975,69.6 57.725,68.85 FH19SC-40S-0.5SH.4@57.725,67.025 FH19SC-40S-0.5SH.4@57.725,67.02 ; v1@56.525,48.712 56.525,49.4 56.875,49.75 58.325,49.75 59.923,48.152 ; FH19SC-40S-0.5SH.5@57.225,67.025 57.225,67.02 FH19SC-40S-0.5SH.4@57.725,67.02 ; 57.725,68.35 59.65,68.35 61.475,66.525 78.449,66.525 79.81,67.886 ; U1.135@59.316,51.749 59.316,50.711 59.923,50.104 59.923,49.204 59.92,49.201 59.92,47.867 60.838,46.949 ; 59.725,40.449 U1.113@62.116,40.449 ; v1(59.9,28.971) 59.921,28.949 U1.90@62.116,28.949 ; U1.102@62.116,34.949 59.051,34.949 58.635,35.365 58.635,38.635 59.75,39.75 59.75,46.6 60.099,46.949 60.838,46.949 ; U1.126@62.116,46.949 60.838,46.949 ; C53.2@69.075,40.95 70.45,39.575 C58.2@70.45,38.876 ; C35.2@69.2,29.425 69.225,29.45 C36.2@69.225,35.475 70.475,36.725 C58.2@70.475,38.175 ; v1(71.556,44.947) C33.2@70.45,44.947 ; U2.3@75.1,23.825 75.1,26.3 74.675,26.725 72.725,26.725 71.7,25.7 U2.5@71.7,23.825 69.05,21.175 59.189,21.175 58.789,20.775 C37.2@57.675,20.775 55.25,20.775 55.1,20.625 C50.2@55.1,20.325 54.65,20.775 C60.2@52.3,20.775 ; R153.2@78.225,45.952 v1(78.225,47.1) ; R153.2@78.25,46 77.425,46 77.175,46.25 77.175,50.5 77.325,50.65 C91.1@78.125,50.65 78.322,50.453 B1.1@80.676,50.453 ; D1.1@82.75,28.103 82.75,26.355 83.259,26.355 LD9.2@83.259,23.225 81.875,21.841 81.875,15.274 83.974,13.175 CONNUSB.4@90.699,13.175 ; B1.4@84.486,50.453 B1.1@80.676,50.453 ; 84.75,69.55 80.099,69.55 79.81,69.261 79.81,67.886 ; CONNUSB.SHIELD@91,8.174 CONNUSB.SHIELD@96.5,8.174 96.5,10.675 94,13.175 CONNUSB.4@90.699,13.175 ; 91.05,59.05 91.05,61.05 91.9,61.9 95.761,61.9 ; 92.75,69.55 95.421,69.55 95.71,69.261 95.761,69.21 95.761,59.761 97.025,58.497 97.025,53.375 92.45,48.8 Cout.2@92.125,48.8 91.825,48.8 88.375,45.35 88.375,36.225 Cin.2@90.6,34 91.185,33.415 JP1.2@96.475,33.415 98.11,33.415 98.425,33.1 98.425,29.671 12VDC.2@93.444,24.69 ; 12VDC.3@96.238,22.15 96.238,16.838 CONNUSB.SHIELD@96.5,16.575 CONNUSB.SHIELD@91,16.575 90.699,16.275 CONNUSB.5@90.699,13.975 CONNUSB.4@90.699,13.175 ; C65.2@30.35,32.475 30.35,34.307 30.675,34.632 30.675,38.675 C56.2@30.4,38.95 ; 35.717,64.041 35.717,63.413 38.532,60.598 40.584,60.598 ; 40.991,11.089 41.455,10.625 45.579,10.625 46.498,9.706 49.523,9.706 50.225,10.408 50.225,12.304 49.604,12.925 ; C94.2@49.509,61.282 C93.2@51.244,61.282 C92.2@52.986,61.282 52.986,61.014 53.85,60.15 56.075,60.15 56.401,60.476 R4.1@56.401,61.373 59.473,61.373 59.9,61.8 59.9,63.7 57.725,65.875 FH19SC-40S-0.5SH.4@57.725,67.02 ; 49.604,12.925 52.3,15.621 C60.2@52.3,20.775 ; C58.2@70.45,38.876 C33.2@70.45,44.947 ; C58.2@70.45,38.876 70.45,38.175 C58.2@70.475,38.175 ; C58.2@70.45,38.876 70.475,38.851 C58.2@70.475,38.175 ; 79.81,67.886 79.81,64.912 80.826,63.896 80.826,59.558 80.826,50.602 B1.1@80.676,50.453
  Bottom Layer w0.203: LCD_TFT.33@6.875,22.76 8.15,24.035 8.15,26.15 8.625,26.625 15.655,26.625 v1(15.875,26.405) 17.069,27.599 25.379,27.599 v1(26.003,26.975) ; LCD_TFT.2@9.415,63.4 15.061,69.045 SWD.3@15.061,70.249 15.061,69.064 16.521,67.604 26.754,67.604 29.802,70.652 v1(35.717,70.652) ; v1@34.775,39.775 37.225,37.325 37.225,30.625 37.85,30 C146.2@39.025,30 47.147,30 v1(47.147,30.025) C144.2@49.4,30.025 ; v1(34.8,39.75) 34.8,38.722 34.503,38.425 33.575,38.425 33.05,38.95 33.05,41.35 33.371,41.671 37.398,41.671 38.892,40.177 39.502,40.177 39.802,40.477 39.802,41.652 39.004,42.45 v1(39.004,43.449) 39.004,45.575 ; v1(46.969,61.282) 46.969,59.146 v1(47.096,59.019) ; 49.404,45.575 v1(49.404,44.287) 49.404,43.421 49.757,43.068 v1(50.217,43.068) ; C151.2@51,49.4 53.45,49.4 v1(53.5,49.35) ; v1(51.55,36.1) 51.004,35.554 51.004,34.275 51.004,33.452 51.292,33.164 51.292,31.892 49.425,30.025 C144.2@49.4,30.025 ; v1(52.25,43.25) 52.725,43.25 53.404,43.929 53.404,45.575 53.404,47.229 55.5,49.325 C143.2@55.8,49.325 ; 53.197,49.325 C143.2@55.8,49.325 ; C145.2@53.425,30.025 52.005,30.025 52.001,30.02 51.499,30.02 51.495,30.025 C144.2@49.4,30.025 ; 55.804,34.275 55.804,40.35 56.277,40.823 57.477,40.823 58.275,40.025 58.275,37.625 58.775,37.125 62.125,37.125 63.525,35.725 64,35.725 64.4,36.125 64.4,37.375 61.675,40.1 61.675,40.95 59.804,42.821 59.804,45.575 ; v1(56.525,48.85) 56.525,48.712 55.912,49.325 C143.2@55.8,49.325 ; 58.204,45.575 58.204,43.741 59.148,42.797 v1@59.822,42.797 ; v1(59.085,21.071) 59.085,23.64 55.38,27.345 53.73,27.345 v1(52.025,29.05) 53.15,30.175 C145.2@53.425,30.175 58.125,30.175 C152.2@58.125,30.05 C149.2@59.9,30.05 v1(59.9,28.971) ; v1(71.556,44.947) 76.072,44.947 v1(78.225,47.1) ; 84.75,69.55 92.75,69.55 ; 12VDC.2@93.444,24.69 93.553,24.69 96.093,22.15 12VDC.3@96.238,22.15
  other v1: 8.377,1.325 13.608,1.325 18.838,1.325 24.069,1.325 29.3,1.325 34.531,1.325 39.762,1.325 44.992,1.325 50.223,1.325 55.454,1.325 60.685,1.325 65.915,1.325 71.146,1.325 76.377,1.325 86.375,2.675 90.5,4.525 86.975,14.825 80.425,18.825 93.25,20.175 20.4,25.825 78.85,28.625 19.35,31.6 86.825,40.35 59.75,42.875 91.9,44.525 78.6,59.875 97.85,63.5 92.85,66.4 83.325,66.575 97.725,70.725 92.55,72.75 67.325,75.8 73.667,75.8 80.008,75.8 86.35,75.8
HS: C94.1 FH19SC-40S-0.5SH.11 U1.12 | length 43.5
  Top Layer w0.203: v1(34.925,44.375) 34.999,44.449 U1.12@37.016,44.449 ; v1(35.565,46.624) 35.107,46.624 34.879,46.852 34.879,52.704 36.55,54.375 v1@39.5,54.375 ; v1(39.5,54.4) v1@39.5,54.598 ; v1(44.15,64.455) 44.378,64.226 47.399,64.226 47.75,63.875 49.075,63.875 49.502,63.448 C94.1@49.502,62.982 49.502,63.202 50.75,64.45 52.65,64.45 54.225,66.025 FH19SC-40S-0.5SH.11@54.225,67.025
  Bottom Layer w0.203: v1(34.925,44.375) 35.925,44.375 36.25,44.7 36.25,45.938 v1(35.565,46.624) ; v1(39.5,54.4) 41.375,56.275 41.725,56.275 43.062,57.612 43.062,63.367 v1(44.15,64.455)
L/R: FH19SC-40S-0.5SH.39 R8.1 R11.2 | length 9
  Top Layer w0.203: FH19SC-40S-0.5SH.39@40.225,67.025 40.225,66.48 40.218,66.48 40.218,64.182 40.3,64.1 43.009,64.1 44.036,63.073 R8.1@44.209,63.073 R11.2@45.951,63.073
LTDC_R2: FH19SC-40S-0.5SH.35 U1.85 | length 155.9
  Top Layer w0.203: v1(4.348,20.944) 3.894,21.399 3.894,52.937 4.482,53.525 v1(5.025,53.525) ; v1(41.525,69.75) 41.975,69.75 42.225,69.5 FH19SC-40S-0.5SH.35@42.225,67.025 ; U1.85@58.816,26.649 58.816,23.709 59.218,23.307 v1(60.807,23.307)
  Bottom Layer w0.203: v1(4.348,20.944) 5.974,19.319 32.145,19.319 32.293,19.171 48.654,19.171 49.264,18.562 52.912,18.562 54.207,19.857 60.634,19.857 60.909,20.132 60.909,23.205 v1(60.807,23.307) ; v1(5.025,53.525) 5.025,56.15 5.71,56.835 17.627,56.835 18.618,55.844 23.169,55.844 24.947,57.622 40.897,57.622 41.841,58.566 41.841,69.434 v1(41.525,69.75)
LTDC_R3: FH19SC-40S-0.5SH.34 U1.56 | length 86.6
  Top Layer w0.203: v1(22.788,61.356) 22.788,58.861 23.825,57.825 23.825,56.1 26.175,53.75 26.175,44.202 28.986,41.391 28.986,40.636 v1(28.2,39.85) ; v1(38.525,61.825) 38.525,67.925 41.125,70.525 42.225,70.525 42.725,70.025 FH19SC-40S-0.5SH.34@42.725,67.025 ; U1.56@44.316,26.649 44.316,24.959 v1(44.325,24.95)
  Bottom Layer w0.203: v1(22.788,61.356) 38.106,61.356 38.575,61.825 v1(38.525,61.825) ; v1(28.2,39.85) 28.2,29.575 32.422,25.353 37.022,25.353 38.45,23.925 39.525,23.925 41.467,25.867 43.408,25.867 v1(44.325,24.95)
LTDC_R4: FH19SC-40S-0.5SH.33 U1.87 | length 102.8
  Top Layer w0.203: v1@40.591,74.016 43.225,71.383 FH19SC-40S-0.5SH.33@43.225,67.025 ; U1.87@59.816,26.649 59.816,25.284 60.15,24.95 63.853,24.95 v1(65.257,26.355) ; v1(66.4,24.856) 72.166,30.622 v1(72.166,58.587)
  Bottom Layer w0.203: v1(40.6,74.025) 40.55,74.025 40.663,73.912 41.475,74.725 43.6,76.85 61,76.85 71.075,66.775 71.075,63.55 74.925,59.7 74.925,58.725 74.225,58.025 72.475,58.025 72.166,58.334 v1(72.166,58.587) ; v1(65.257,26.355) 65.257,25.999 v1(66.4,24.856)